# Altium PCB PCB1.PcbDoc
Units mm, origin at the board's own origin, x right, y up, seen from the top; angles counter-clockwise.
Board outline 40.09 x 40.09 mm, 2 copper layers (Top Layer, Bottom Layer); 32 components, 17 nets, 145 pads, 57 vias.
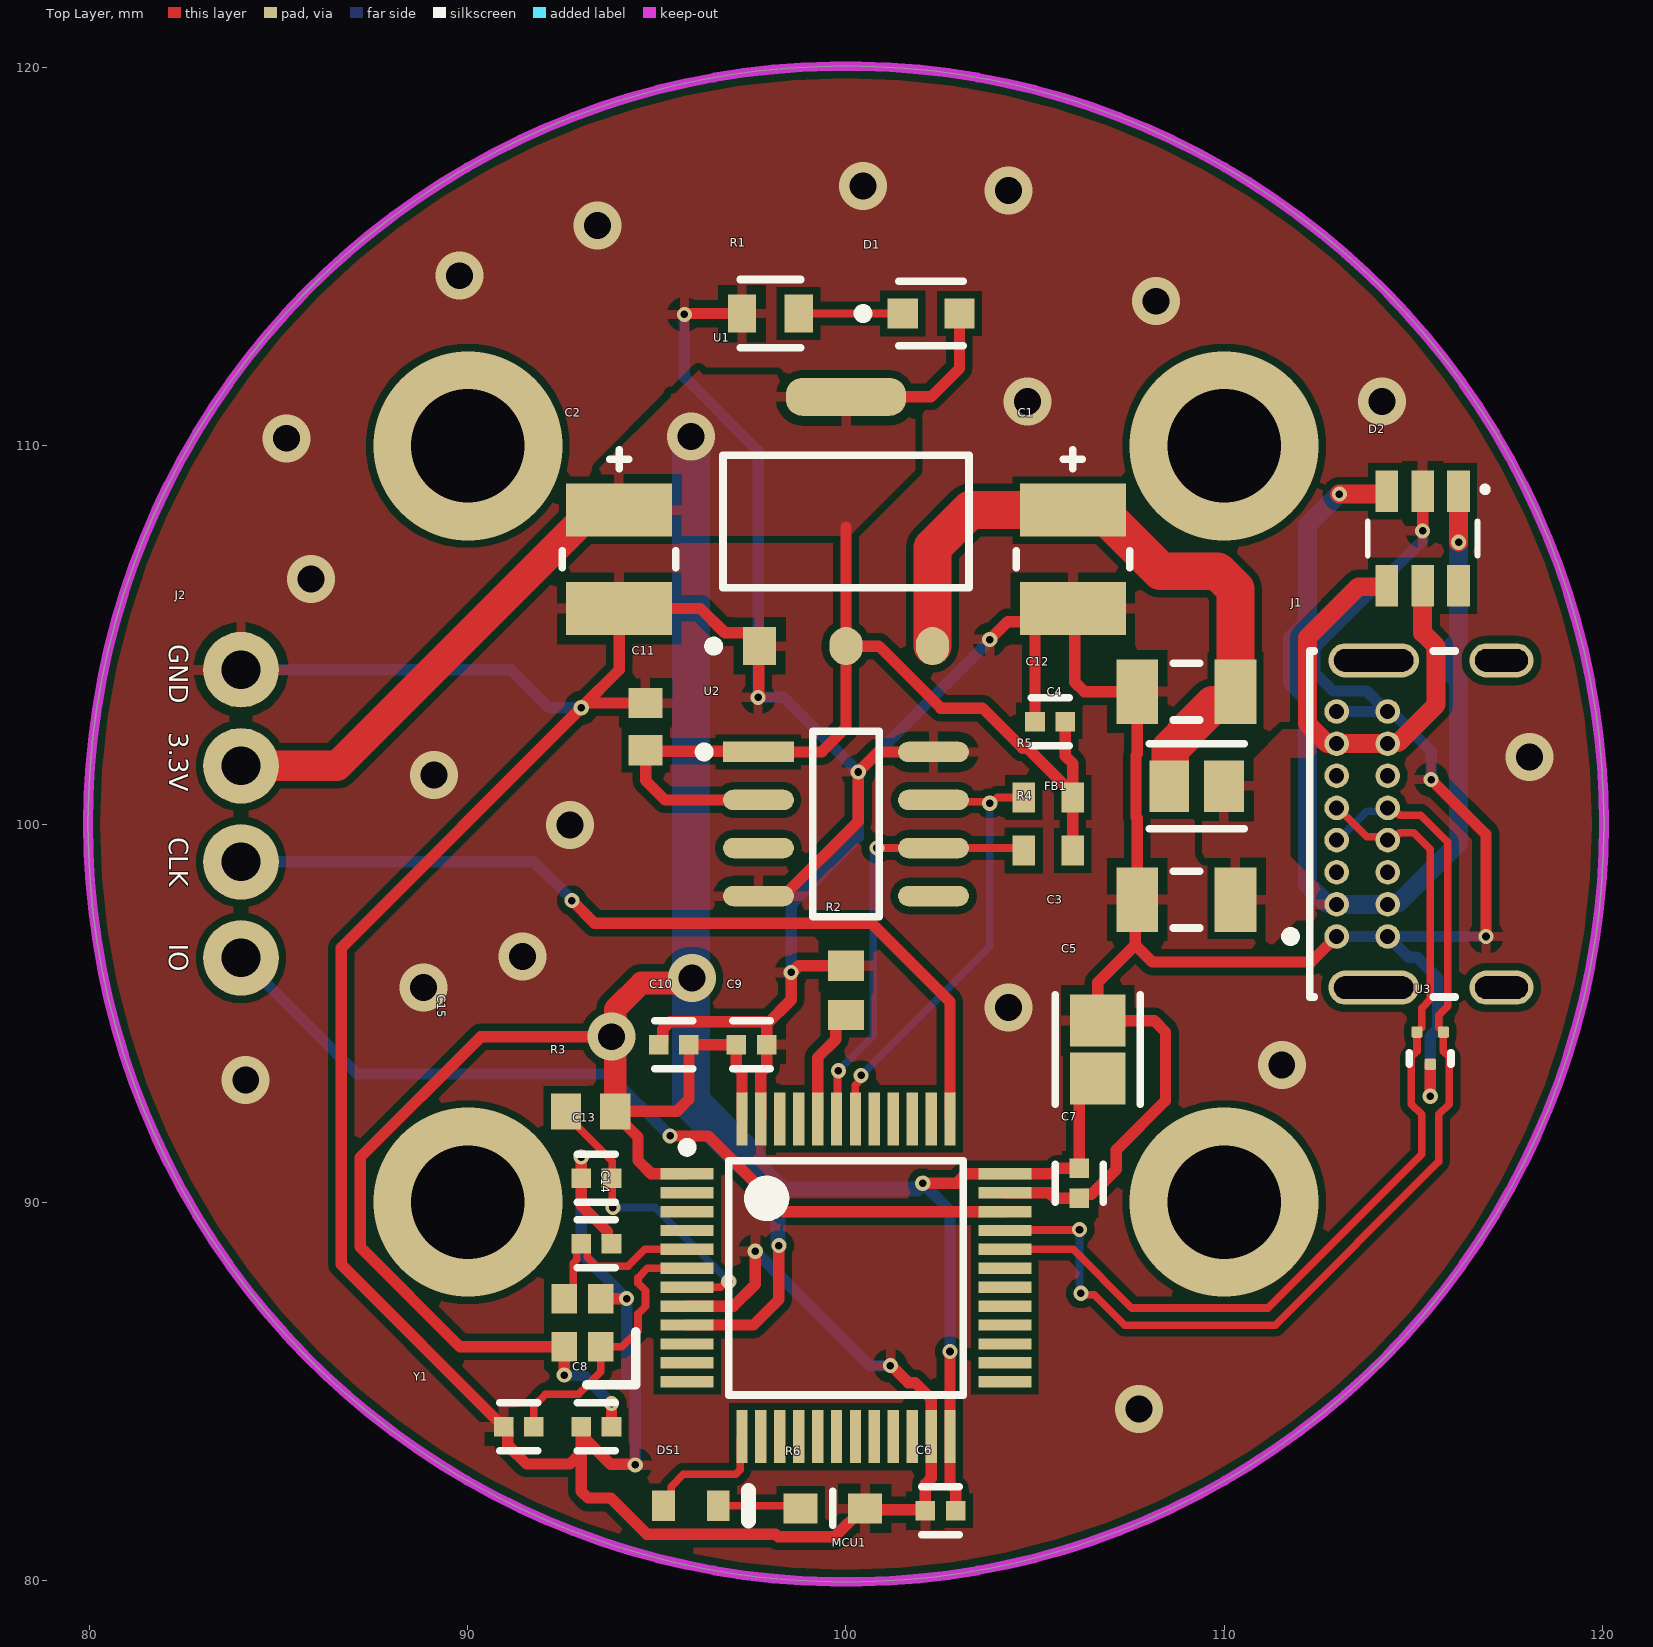
[diagram p0: Top Layer view]
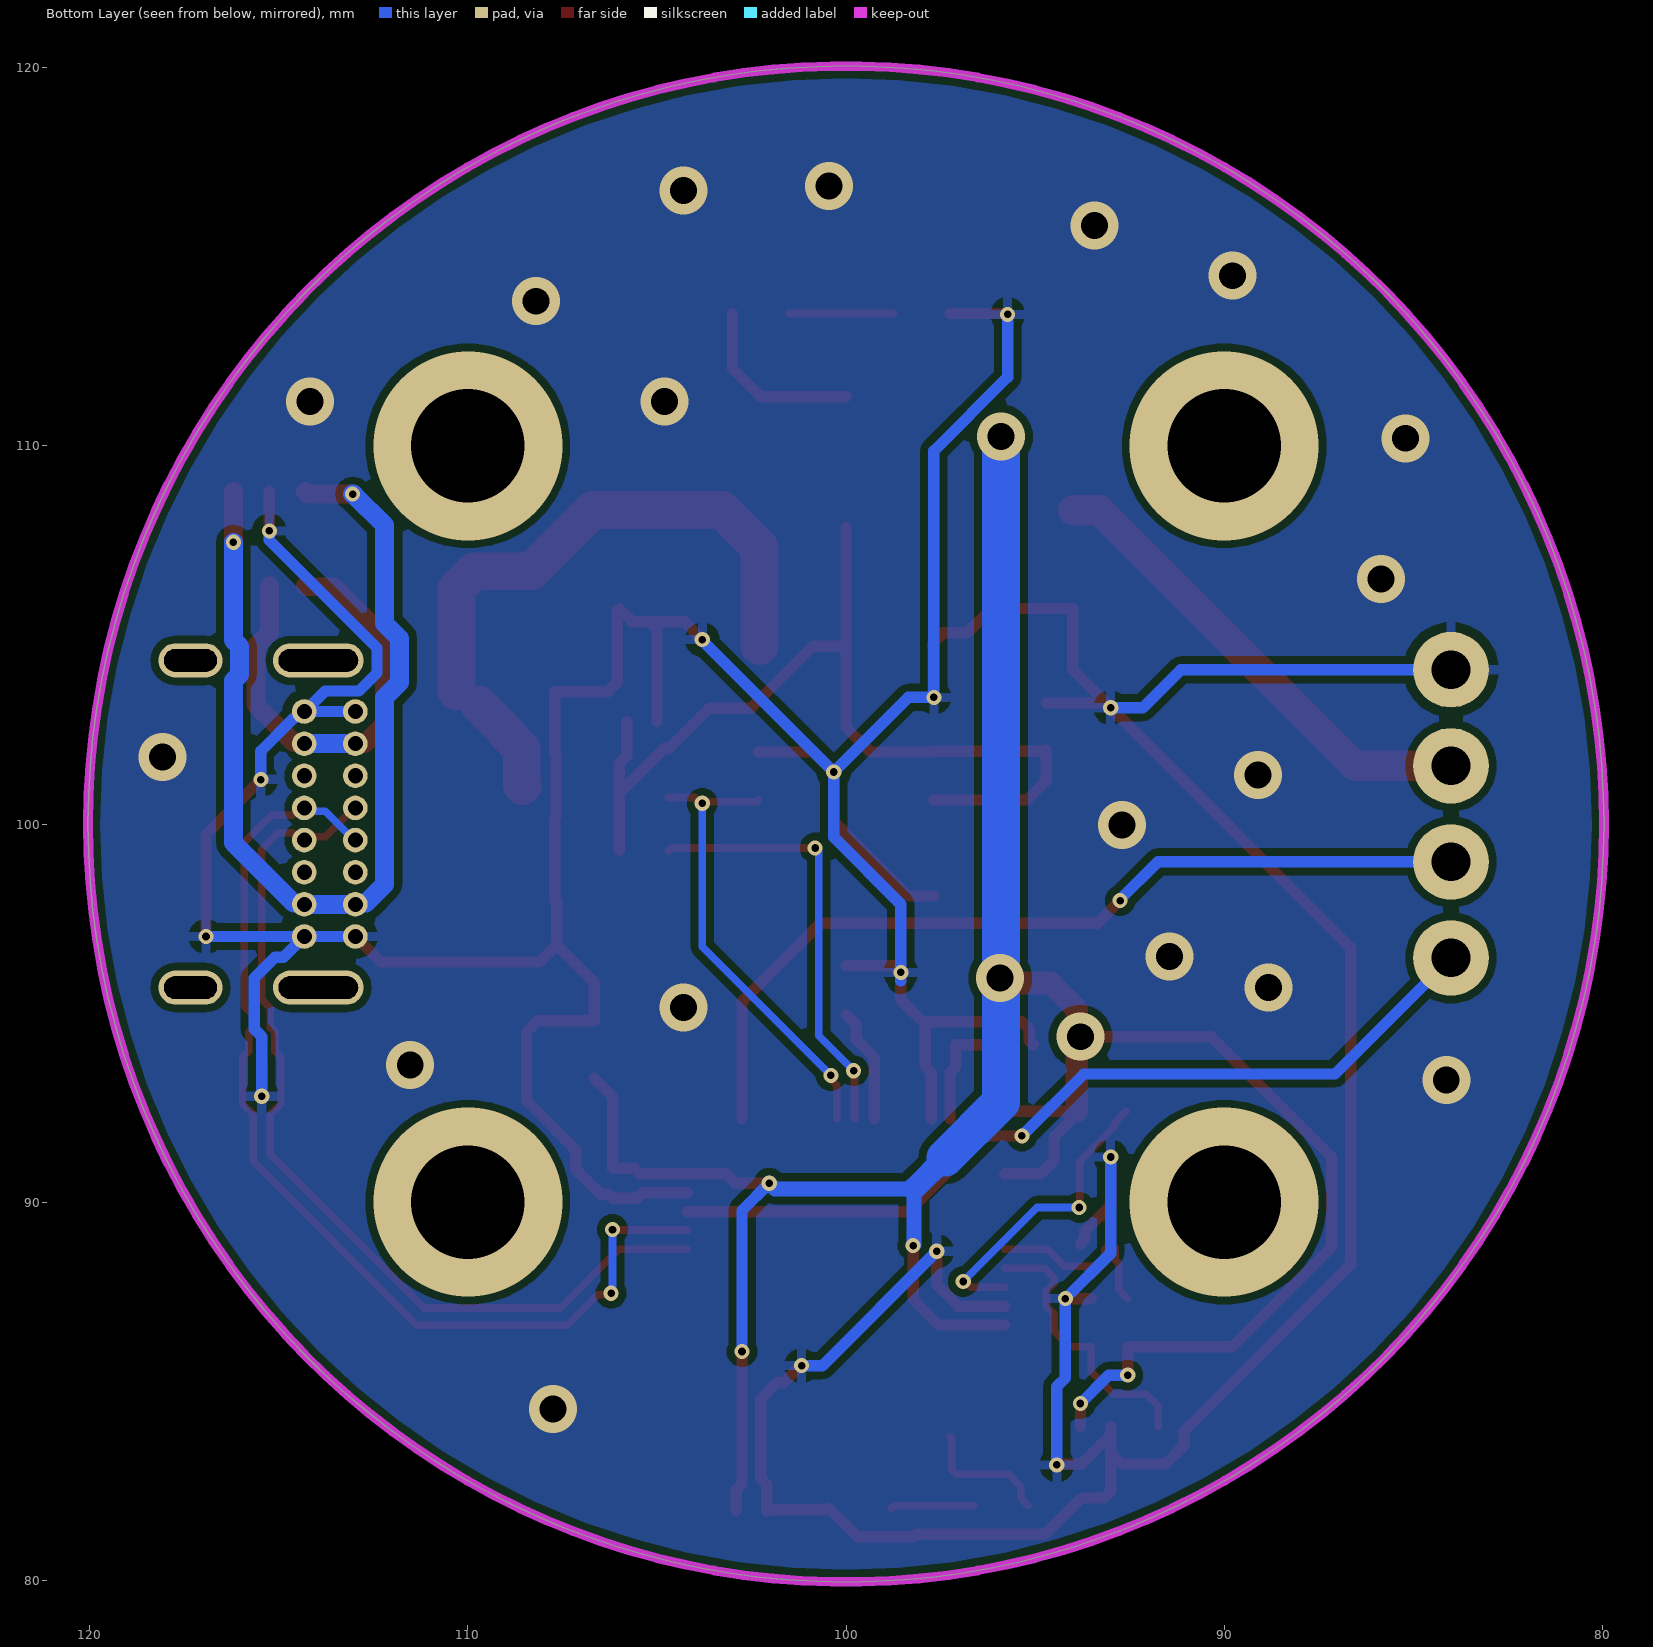
[diagram p1: Bottom Layer view, seen from below]
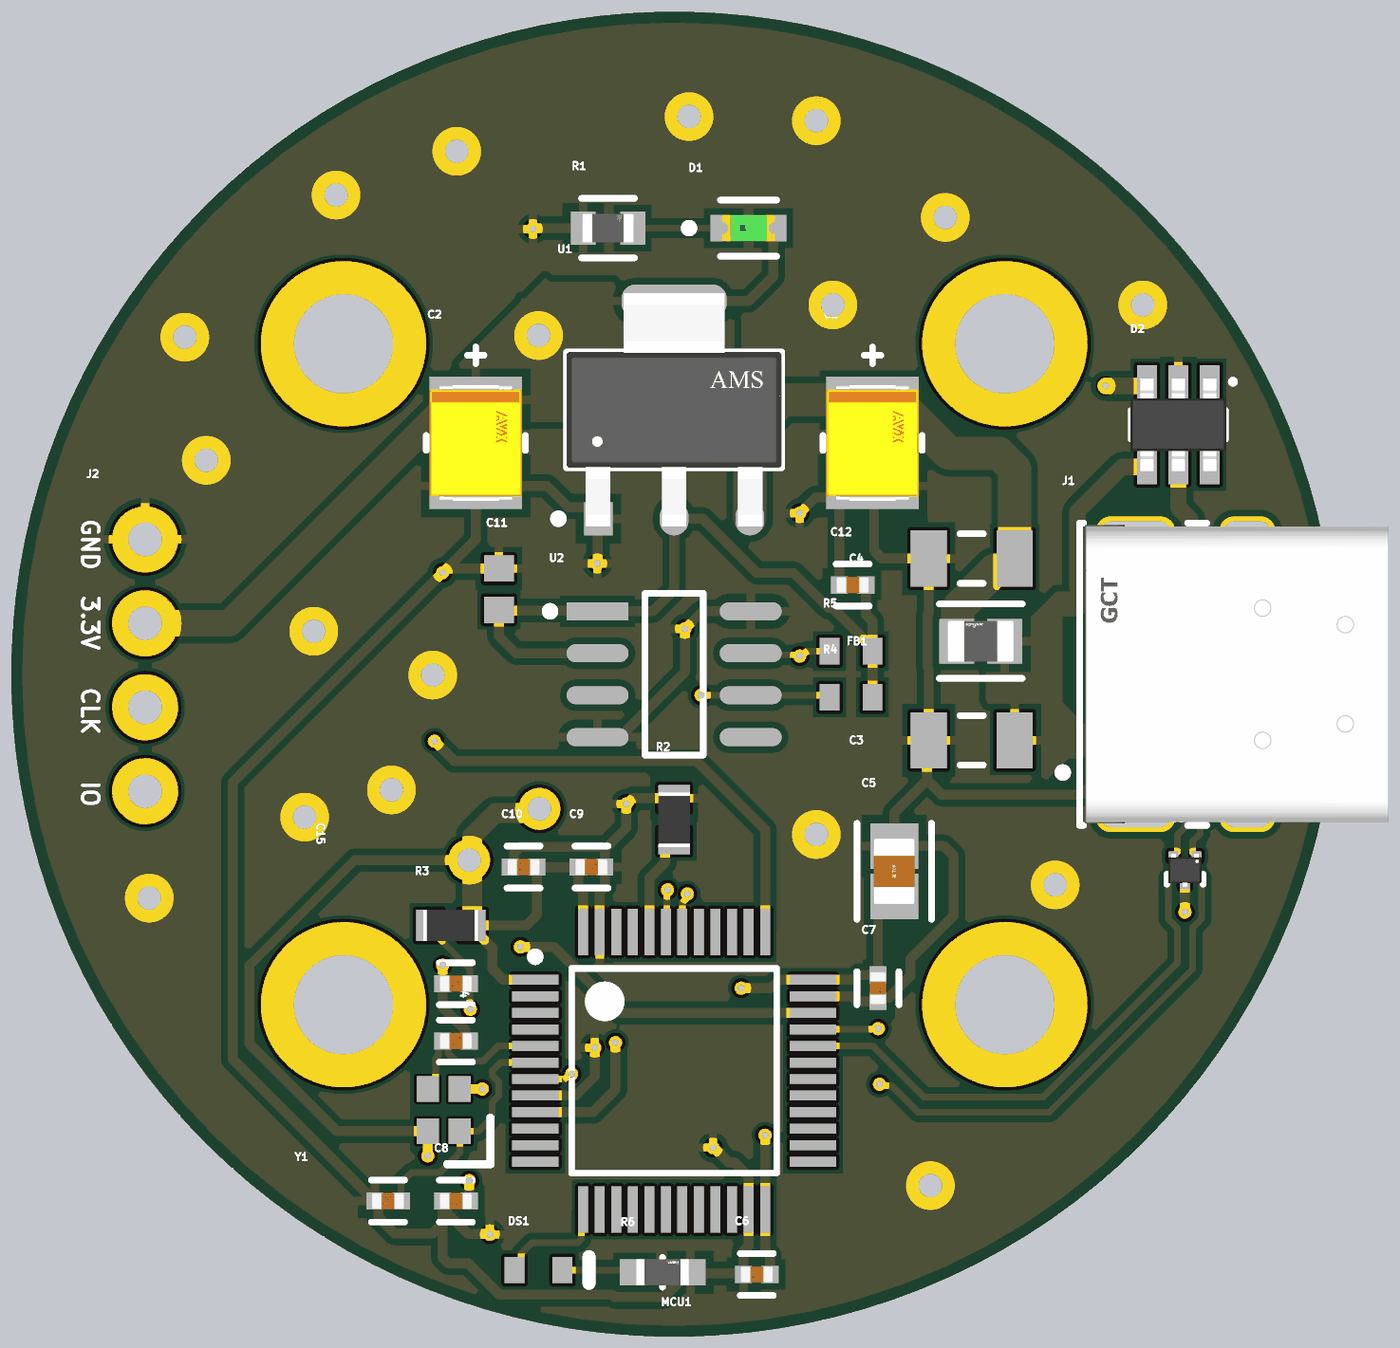
[diagram p2: 3D render of the assembled board from above, using the file's embedded part models]

## Layer stack, top to bottom
Top Solder: solder mask 0.0102, Solder Resist, Dk 3.5
Top Layer: signal copper 0.0356
Dielectric 1: dielectric 0.32, FR-4, Dk 4.8
Bottom Layer: signal copper 0.0356
Bottom Solder: solder mask 0.0102, Solder Resist, Dk 3.5

## Board outline
100,79.953 cw(c100,100) 79.953,100 cw(c100,100) 100,120.047 cw(c100,100) 120.047,100 cw(c100,100)

## Design rules (kind name [scope] priority, off if disabled: settings)
Clearance [All] p1: gap=0.2 ignorepadtopadclearanceinfootprint=TRUE except(0.15: SMDPad-SMDPad)
DiffPairsRouting [All] p1: maxlimit=0.254 minlimit=0.2 mostfreqgap=0.254 toplayer_minwidth=0.2 toplayer_maxwidth=0.381 toplayer_prefwidth=0.381 bottomlayer_minwidth=0.2 bottomlayer_maxwidth=0.381 bottomlayer_prefwidth=0.381 maxuncoupledlength=12.7
HoleSize [All] p1: absolutevalues=TRUE maxlimit=5 minlimit=0.025 maxpercent=80.000 minpercent=20.000
MinimumSolderMaskSliver [All] p1: minsoldermaskwidth=0.2
PolygonConnect [All] p1: connectstyle=Relief reliefconductorwidth=0.254 reliefentries=4 polygonreliefangle="90 Angle" airgapwidth=0.254
RoutingVias [All] p1: holewidth=0.2 width=0.4 viastyle="Through Hole" minholewidth=0.15 minwidth=0.3 maxholewidth=8 maxwidth=10
SilkToSilkClearance [All] p1 off: silktosilkclearance=0.254
SilkToSolderMaskClearance [IsPad] p1: minsilkscreentomaskgap=0.2 clearancetoexposedcopper=TRUE
SolderMaskExpansion [All] p1: expansion=0.102 istentingtop=FALSE
SupplyNets "Schematic Supply Nets_2" [InNet('GND')] p1: voltage=0.000
SupplyNets "Schematic Supply Nets_1" [InNet('+3V3')] p2: voltage=0.000
SupplyNets "Schematic Supply Nets" [InNet('+5V')] p3: voltage=0.000
UnRoutedNet [All] p1 off:
Width [All] p1: maxlimit=2 minlimit=0.16 preferedwidth=0.2 minimp=50.000000 maximp=50.000000 favimp=50.000000
24 further rules are at their usual default settings.

## Classes and differential pairs
differential pair USBD: +USBD_P -USBD_N

## Components (designator, comment, footprint, x,y, rotation, side; value= is the part's Value field where it differs from the comment)
C1 "22u tant" FP-TAJB-MFG 106,107 r90 top
C2 "22u tant" FP-TAJB-MFG 94,107 r90 top
C3 "2u2" CAPC3216X180X50LL20T25 109,98 r0 top
C4 "2u2" CAPC3216X180X50LL20T25 109,103.5 r0 top
C5 "4u7" FP-C2012-125-0_2-IPC_B 106.657,94.036 r90 top
C6 "100n" FP-C0402-BB-MFG 102.5,81.836 r180 top value="0.10 μF"
C7 "100n" FP-C0402-BB-MFG 106.164,90.5 r270 top value="0.10 μF"
C8 "100n" FP-C0402-BB-MFG 93.4,84.057 r180 top locked value="0.10 μF"
C9 "100n" FP-C0402-BB-MFG 97.5,94.164 r0 top value="0.10 μF"
C10 "100n" FP-C0402-BB-MFG 95.446,94.164 r180 top value="0.10 μF"
C11 "1u" CAPC1608X87X35LL15T15 94.7,102.575 r270 top
C12 "100n" FP-C0402-BB-MFG 105.4,102.7 r180 top value="0.10 μF"
C13 "100n" FP-C0402-BB-MFG 93.4,90.636 r180 top locked value="0.10 μF"
C14 "10p" FP-C0402-BB-MFG 91.346,84.057 r180 top value="10 pF"
C15 "10p" FP-C0402-BB-MFG 93.4,88.9 r0 top locked value="10 pF"
D1 "GREEN_LED" FP-LTST-C190GKT-MFG 102.25,113.5 r0 top
D2 "82402305" WE-TVS_SOT23-6L 115.25,107.55 r180 top
DS1 "RED_LED" VISH-TLMX1100_V 95.9,81.971 r0 top
FB1 "120R" FP-BLM21-0_2-t0_85-e0_5-d-IPC_C 109.274,101 r180 top
J1 "USB-C" FP-USB4085-GF-A-MFG 117,100 r90 top locked
J2 "SWD_pinout" SWD_pinout 84,104.08 r270 top
MCU1 "STM32F070CBT6" STM32F070CBT6 100,88 r0 top locked
R1 "1k" FP-CRCW0603-e3-MFG 98,113.5 r0 top
R2 "10k" RESC1609X50X30NL8T20 100,95.6 r270 top
R3 "10k" RESC1609X50X30NL8T20 93.246,92.4 r180 top
R4 "2k" RESC1608X55X25LL10T15 105.35,99.3 r0 top
R5 "2k" RESC1608X55X25LL10T15 105.35,100.7 r0 top
R6 "1k" FP-RC0603-0_55-MFG 99.65,81.9 r0 top
U1 "AMS1117-3.3" FP-AMS1117-IPC_C 100,108 r90 top locked
U2 "AS5600-ASOM" FP-AS5600-ASOM-IPC_C 100,100 r0 top locked
U3 "TPD2EUSB30DRTR" DRT0003A 115.45,94.071 r270 top
Y1 "OT201616MJBA4SL" OT201616MJBA4SL 92.544,86.173 r90 top locked

## Footprints (in the part's own frame and the unit in brackets; to place one, negate y for a bottom-side part, rotate by r counter-clockwise, add the part's x,y. Pads: shape width x height; smd on the part's side, far side on the other; paste and mask are expansions set on the pad)
CAPC1608X87X35LL15T15 [mm] "Chip Capacitor, 2-Leads, Body 1.60x0.80mm, IPC High Density"
  rect 0.8x0.9 smd: 1(-0.625,0) 2(0.625,0)
  body extent -0.87,-0.48 0.87,0.48, height 0.87
CAPC3216X180X50LL20T25 [mm] "Chip Capacitor, 2-Leads, Body 3.20x1.60mm, IPC High Density"
  rect 1.1x1.7 smd: 1(-1.3,0) 2(1.3,0)
  silkscreen extent -0.35,-0.75 0.35,0.75, body extent -1.7,-0.9 1.7,0.9, height 1.8
DRT0003A [mm] "SOTFL, 3-Leads, Body 1x1mm (inc leads), Pitch 0.35mm"
  rrect33% 0.3x0.3 smd: 1(-0.425,0.35) 2(-0.425,-0.35) 3(0.425,0)
  silkscreen extent 0.13,-0.55 0.43,0.55, body extent -0.5,-0.5 0.5,0.5, height 0.5
FP-AMS1117-IPC_C [mm]
  rect 1.004x0.872 smd paste+0 mask+0: 1(-3.295,2.29)
  rrect100% 1.004x0.872 smd paste+0 mask+0: 2(-3.295,0) 3(-3.295,-2.29)
  rrect87% 1.004x3.182 smd paste+0 mask+0: 4(3.295,0)
  silkscreen extent -3.42,-3.25 1.75,3.62, body extent -3.9,-3.35 3.9,3.35, height 0.25
FP-AS5600-ASOM-IPC_C [mm]
  rect 1.874x0.542 smd paste+0 mask+0: 1(-2.316,1.905)
  rrect100% 1.874x0.542 smd paste+0 mask+0: 2(-2.316,0.635) 3(-2.316,-0.635) 4(-2.316,-1.905) 5(2.316,-1.905) 6(2.316,-0.635) 7(2.316,0.635) 8(2.316,1.905)
  silkscreen extent -3.88,-2.45 0.88,2.45
FP-BLM21-0_2-t0_85-e0_5-d-IPC_C [mm]
  rect 1.055x1.356 smd paste+0 mask+0: 1(-0.726,0) 2(0.726,0)
  silkscreen extent -1.25,-1.12 1.25,1.12, body extent -1.35,-0.82 1.35,0.82, height 0.25
FP-C0402-BB-MFG [mm]
  rect 0.52x0.52 smd paste+0 mask+0: 1(-0.4,0) 2(0.4,0)
  silkscreen extent -0.5,-0.64 0.5,0.64, body extent -0.8,-0.4 0.8,0.4, height 0.25
FP-C2012-125-0_2-IPC_B [mm]
  rect 1.378x1.456 smd paste+0 mask+0: 1(-0.764,0) 2(0.764,0)
  silkscreen extent -1.45,-1.13 1.45,1.13, body extent -1.7,-0.98 1.7,0.98, height 0.25
FP-CRCW0603-e3-MFG [mm]
  rect 0.75x1 smd paste+0 mask+0: 1(-0.75,0) 2(0.75,0)
  silkscreen extent -0.8,-0.9 0.8,0.9, body extent -1.22,-0.6 1.22,0.6, height 0.25
FP-LTST-C190GKT-MFG [mm]
  rect 0.8x0.8 smd paste+0 mask+0: 1(-0.75,0) 2(0.75,0)
  silkscreen extent -1.92,-0.85 0.85,0.85, body extent -1.25,-0.55 1.25,0.55, height 0.25
FP-RC0603-0_55-MFG [mm]
  rect 0.9x0.8 smd paste+0 mask+0: 1(-0.85,0) 2(0.85,0)
  silkscreen extent 0,-0.45 0,0.45, body extent -1.4,-0.55 1.4,0.55, height 0.25
FP-TAJB-MFG [mm]
  rect 1.4x2.8 smd paste+0 mask+0: 1(-1.3,0) 2(1.3,0)
  silkscreen extent -0.23,-1.5 2.9,1.5, body extent -2.1,-1.6 2.1,1.6, height 0.25
FP-USB4085-GF-A-MFG [mm]
  rrect100% 0.9x2.4 hole 2.1 slot 0.6 at 0 deg paste-2539.97 mask+0: 1(-4.325,3.045) 2(4.325,3.045)
  rrect100% 0.9x1.7 hole 1.4 slot 0.6 at 0 deg paste-2539.97 mask+0: 3(-4.325,-0.335) 4(4.325,-0.335)
  round 0.65 hole 0.4 paste-2539.97 mask+0: A1(-2.975,4.025) A4(-2.125,4.025) A5(-1.275,4.025) A6(-0.425,4.025) A7(0.425,4.025) A8(1.275,4.025) A9(2.125,4.025) A12(2.975,4.025) B1(2.975,2.675) B4(2.125,2.675) B5(1.275,2.675) B6(0.425,2.675) B7(-0.425,2.675) B8(-1.275,2.675) B9(-2.125,2.675) B12(-2.975,2.675)
  silkscreen extent -4.57,0.89 4.57,5.37, body extent -4.87,-4.83 4.87,4.83, height 0.25
OT201616MJBA4SL [mm]
  rect 0.775x0.675 smd mask+0.075: 1(0,-0.975) 2(1.275,-0.975) 3(1.275,0) 4(0,0)
  silkscreen extent -1,-1.9 0.4,-0.6
RESC1608X55X25LL10T15 [mm] "Chip Resistor, 2-Leads, Body 1.60x0.80mm, IPC High Density"
  rect 0.6x0.8 smd: 1(-0.65,0) 2(0.65,0)
  body extent -0.85,-0.45 0.85,0.45, height 0.55
RESC1609X50X30NL8T20 [mm] "Chip Resistor, 2-Leads, Body 1.65x0.95mm, IPC Medium Density"
  rect 0.8x0.95 smd: 1(-0.65,0) 2(0.65,0)
  body extent -0.82,-0.48 0.82,0.48, height 0.5
STM32F070CBT6 [mm] "TSQFP, 48-Leads, Body 7,00x7,00mm, Pitch 0,50mm, IPC Medium Density"
  rect 1.4x0.3 smd: 1(-4.2,2.75) 2(-4.2,2.25) 3(-4.2,1.75) 4(-4.2,1.25) 5(-4.2,0.75) 6(-4.2,0.25) 7(-4.2,-0.25) 8(-4.2,-0.75) 9(-4.2,-1.25) 10(-4.2,-1.75) 11(-4.2,-2.25) 12(-4.2,-2.75) 25(4.2,-2.75) 26(4.2,-2.25) 27(4.2,-1.75) 28(4.2,-1.25) 29(4.2,-0.75) 30(4.2,-0.25) 31(4.2,0.25) 32(4.2,0.75) 33(4.2,1.25) 34(4.2,1.75) 35(4.2,2.25) 36(4.2,2.75)
  rect 0.3x1.4 smd: 13(-2.75,-4.2) 14(-2.25,-4.2) 15(-1.75,-4.2) 16(-1.25,-4.2) 17(-0.75,-4.2) 18(-0.25,-4.2) 19(0.25,-4.2) 20(0.75,-4.2) 21(1.25,-4.2) 22(1.75,-4.2) 23(2.25,-4.2) 24(2.75,-4.2) 37(2.75,4.2) 38(2.25,4.2) 39(1.75,4.2) 40(1.25,4.2) 41(0.75,4.2) 42(0.25,4.2) 43(-0.25,4.2) 44(-0.75,4.2) 45(-1.25,4.2) 46(-1.75,4.2) 47(-2.25,4.2) 48(-2.75,4.2)
  silkscreen extent -4.32,-3.1 3.1,3.57, body extent -3.5,-3.5 3.5,3.5, height 1.6
SWD_pinout [mm]
  round 2 / inner round 1.524 / far side round 2 hole 1.02: 1(0,0) 2(2.54,0) 3(5.08,0) 4(7.62,0)
VISH-TLMX1100_V [mm] "SMD, 2-Leads, Body 1.6x0.8mm"
  rect 0.6x0.8 smd: 1(-0.725,0) 2(0.725,0)
  silkscreen extent 1.53,-0.4 1.53,0.4, body extent -0.8,-0.4 0.8,0.4, height 0.65
WE-TVS_SOT23-6L [mm] "TVS Diode, package SOT23-6L"
  rect 0.6x1.1 smd: 1(-0.95,-1.25) 2(0,-1.25) 3(0.95,-1.25) 4(0.95,1.25) 5(0,1.25) 6(-0.95,1.25)
  silkscreen extent -1.73,-1.37 1.45,0.45, body extent -1.45,-1.4 1.45,1.4, height 1.16

## Part data
C1 C2: library part CMP-2100-03689-2, "22uF 16V  ±10% 2.3Ω 1210  SMD Tantalum Capacitor", Capacitance=22uF, Case Code (Imperial)=1210, Case Code (Metric)=3528, Dielectric Material=Tantalum, ESR (Equivalent Series Resistance)=2.3R, Leakage Current=3.5uA, Max Operating Temperature=125°C, Min Operating Temperature=-55°C, Package Quantity=1, Tolerance=10%, Voltage=16V, Case/Package=1210, Construction=Flat, Depth=2.8mm, Dissipation Factor=6%, Features="General Purpose", Height=1.9mm, Height - Seated (Max)=0.083inch, Lead Free="Lead Free", Length=3.5mm, Mount="Surface Mount", Number of Pins=2, Packaging="Tape and Reel", Polarity=Polar, Radiation Hardening=No, REACH SVHC="No SVHC", RoHS Compliant=Yes, Series=TAJ, Termination=SMD/SMT, Voltage Rating=16V, Voltage Rating (DC)=16V, Width=2.8mm
C3 C4: library part CMP-1037-04831-2, "Chip Capacitor, 2.2 uF, +/- 10%, 50 V, -55 to 125 degC, 1206 (3216 Metric), RoHS, Tape and Reel", Capacitance=2.2uF, Capacitance - nF=2200nF, Case Code - in=1206, Case Code - mm=3216, Case Height=1.6mm, Case Length=3.2mm, Dielectric=X7R, Manufacturer=Kemet, Maximum Operating Temperature=+125C, Minimum Operating Temperature=-55C, Operating Temperature Range=-55Cto+125C, Package / Case=1206(3216metric), Package Description="2-Pin Surface Mount Device, Body 3.2 x 1.6 mm", Temperature Coefficient / Code=+/-15%, Tolerance=10%, Voltage Rating=50V, Brand=Kemet, Case Width=1.6mm, Class=Class1, Datasheet URL=http://www.kemet.com/docfinder?Partnumber=C1206C225K5RACTU, Datasheet Version=02/2016, Dimensions=1.6mmWx3.2mmLx1.6mmH, Factory Pack Quantity=2000, Manufacturer URL=http://www.kemet.com/, Mounting Technology=SurfaceMount, Package Reference=1206, Packaging=Reel, Product=GeneralTypeMLCCs, Product Category=MultilayerCeramicCapacitorsMLCC-SMD/SMT, RoHS=Details, Series=C1206C, Termination Style=SMD/SMT, Type=SMDMLCCX7R6.3-250VDCCommericalGrade, Voltage Rating DC=50V
C5: library part CMP-08246-000007-2, "Multilayer Ceramic Capacitors 4.7μF ±10% 50V X5R SMD 0805", Capacitance=4.7uF, Case Code (Imperial)=0805, Case Code (Metric)=2012, Dielectric=X5R, Dielectric Material=Ceramic, Max Operating Temperature=85°C, Min Operating Temperature=-55°C, Package Quantity=1, Tolerance=10%, Voltage=50V, Case/Package=0805, Construction=Flat, Depth=1.25mm, Height=1.25mm, Lead Free="Lead Free", Length=2mm, Mount="Surface Mount", Packaging="Tape and Reel", Radiation Hardening=No, REACH SVHC="No SVHC", Resistor Type=Ceramic, Series=C, Termination=SMD/SMT, Thickness=0.057inch, Voltage Rating=50V, Voltage Rating (DC)=50V, Weight=0.000194oz, Width=0.049inch
C6 C7 C8 C9 C10 C12 C13: library part CMP-2008-02046-2, "CAP CER 0.1UF 10V X5R 0402", Capacitance="0.10 μF", Manufacturer=Kemet, Manufacturer Part Number=C0402C104K8PACTU, Package=C0402-BB, Temperature="-55°C to +125°C", Temperature Characteristic=X5R, Temperature Coefficient=15%, Temperature Range High=+125°C, Temperature Range Low=-55°C, Tolerance=0.1, Voltage Rating="10 V", Automotive=No, Category=Cap, ComponentLink2Description=Datasheet, ComponentLink2URL=https://content.kemet.com/datasheets/KEM_C1002_X7R_SMD.pdf, Device Class L1="Passive Components", Device Class L2=Capacitors, Device Class L3="Ceramic Capacitors", Digikey Description="CAP CER 0.1UF 10V X5R 0402", Height=0.55mm, Ipc Land Pattern Name=CAPC10050X50, Lead Free=Yes, Material=Ceramic, Mouser Description="Capacitor 100 nF 10 VDC 0402", Octopart=https://octopart.com/c0402c104k8pactu-kemet-140039, RoHS=TRUE
C11: library part CMP-2006-03713-1, Manufacturer=Kemet, Part Number=C0603C105K3RACTU
C14 C15: library part CMP-2008-03404-2, "Multilayer Ceramic Capacitor, C Series, 10 Pf, - 5%, C0G / Np0, 50 V, 0402 [1005 Metric] Rohs Compliant: Yes", Capacitance="10 pF", Manufacturer=Kemet, Manufacturer Part Number=C0402C100J5GACTU, Package=C0402-BB, Temperature="-55°C to +125°C", Temperature Characteristic=C0G, Temperature Coefficient=15%, Temperature Range High=+125°C, Temperature Range Low=-55°C, Tolerance=0.05, Voltage Rating="50 V", Automotive=No, Category=Cap, ComponentLink2Description=Datasheet, ComponentLink2URL=https://content.kemet.com/datasheets/KEM_C1002_X7R_SMD.pdf, Device Class L1="Passive Components", Device Class L2=Capacitors, Device Class L3="Ceramic Capacitors", Digikey Description="Multilayer Ceramic Capacitor, C Series, 10 Pf, - 5%, C0G / Np0, 50 V, 0402 [1005 Metric] Rohs Compliant: Yes", Height=0.55mm, Ipc Land Pattern Name=CAPC10050X50, Lead Free=Yes, Material=Ceramic, Mouser Description="Multilayer Ceramic Capacitor, C Series, 10 Pf, - 5%, C0G / Np0, 50 V, 0402 [1005 Metric] Rohs Compliant: Yes", Octopart=https://octopart.com/c0402c100j5gactu-kemet-108448, RoHS=TRUE
D1: library part CMP-22017-000005-2, "LED GREEN CLEAR CHIP SMD", Case Code (Imperial)=0603, Case Code (Metric)=1608, Color=Green, Forward Current=30mA, Forward Voltage=2.1V, Lens Color=Colorless, Max Operating Temperature=85°C, Min Operating Temperature=-55°C, Package Quantity=1, Power Dissipation=100mW, Reverse Voltage=5V, Test Current=10mA, Voltage=2V, Case/Package=0603, Depth=0.8mm, Dominant Wavelength=569nm, Height=0.8mm, Illumination Color=Green, Lead Free="Lead Free", Length=1.6mm, Lens Style=Clear, Lens Transparency=Clear, Luminous Intensity=6mcd, Mount="Surface Mount", Number of Elements=1, Number of LEDs=1, Number of Pins=2, Packaging="Tape and Reel", Power Rating=100mW, Radiation Hardening=No, Viewing Angle=130°, Wavelength=565nm, Width=0.8mm
D2: library part CMP-1485-00003-2, Breakdown Voltage=6V, Capacitance=13pF, Case/Package=SOT-23, Clamping Voltage=6.8V, Forward Voltage=800mV, Max Operating Temperature=85°C, Max Reverse Leakage Current=2.5A, Max Surge Current=6A, Min Operating Temperature=-55°C, Power Line Protection=No, Reverse Standoff Voltage=5V, Test Current=1mA, Composition=Zener, Direction=Unidirectional, Element Configuration="Common Anode", ESD Protection=Yes, Height=1.16mm, Length=2.9mm, Max Breakdown Voltage=6V, Min Breakdown Voltage=6V, Mount="Surface Mount", NexarPartId=18190104, Number of Channels=5, Number of Pins=6, Number of Unidirectional Channels=5, Packaging="Cut Tape (CT)", Peak Pulse Current=6A, Polarity=Unidirectional, REACH SVHC=Unknown, RoHS=Compliant, Termination=SMD/SMT, Width=2.8mm, Working Voltage=5V
DS1: library part CMP-1666-00027-1, "LED, RED, 2.1 V, -40 to 100 degC, 2-Pin SMD (0603), RoHS, Tape and Reel", Capacitance="12 pF", Case Code (Imperial)=0603, Case Code (Metric)=1608, Max Operating Temperature=125degC, Min Operating Temperature=-55degC, Package Quantity=4000, Resistance="100000000000 Ohm", Tolerance=5%, Type (Capacitors)=C0G, Voltage Rating="50 V", Case/Package=0603, ComponentLink1Description="Manufacturer URL", ComponentLink1URL=http://www.vishay.com/, ComponentLink2Description=Datasheet, ComponentLink2URL=http://www.vishay.com/docs/83173/tlmb1100.pdf, DatasheetVersion="Rev. 2.7, 03/2016", Height="0.8 mm", Length="1.6 mm", Mount="Surface Mount", PackageDescription="2-Pin Surface Mount Device, Body 1.6 x 0.8 mm", PackageReference=TLMX1100, Packaging="Tape and Reel", Pins=2, Radiation Hardening=No, REACH SVHC="No SVHC", RoHSCompliant=True, Voltage Rating (DC)="50 V", Width="0.8 mm"
FB1: library part CMP-0686-00612-3, "Chip Ferrite Bead, 0805, 120Ω @ 100MHz, 0.03Ω, 25%, 3A", Case Code (Imperial)=0805, Case Code (Metric)=2012, Current Rating=3A, DC Resistance (DCR)=30mR, Max Operating Temperature=125°C, Min Operating Temperature=-55°C, Package Quantity=1, Test Frequency=100MHz, Tolerance=25%, Case/Package=0805, DC Resistance-Max=30mR, Depth=1.25mm, Height=0.85mm, Impedance=120R, Lead Free="Lead Free", Length=2mm, Material=Steel, Max Current Rating=3A, Max DC Current=3A, Number of Circuits=1, Number of Lines=1, Number of Pins=2, Packaging="Tape and Reel", REACH SVHC="No SVHC", RoHS Compliant=Yes, Series=BLM21P, Termination=SMD/SMT, Width=1.25mm
J1: library part CMP-196119-000001-2, "CONN RCPT USB2.0 TYPE C 24POS RA", Contact Material="Copper Alloy", Contact Plating=Gold, Gender=Receptacle, Number of Positions=16, Orientation="Right Angle", USB Standard="USB 2.0"
R1: library part CMP-2000-03062-2, "RES Thick Film, 200Ω, 1%, 0.1W, 100ppm/°C, 0603", Case Code (Imperial)=0603, Case Code (Metric)=1608, Max Operating Temperature=155°C, Min Operating Temperature=-55°C, Package Quantity=5000, Power Rating=100mW, Resistance=200R, Temperature Coefficient=100ppm/°C, Tolerance=1%, Voltage Rating=75V, Case/Package=0603, Composition="Thick Film", Contact Plating=Tin, Depth=0.85mm, Height=0.45mm, Lead Free="Lead Free", Length=1.55mm, Military Standard=Not, Number of Pins=2, Packaging="Tape and Reel", Termination=SMD/SMT, Voltage Rating (DC)=75V, Weight=7.1E-05oz, Width=0.85mm
R2 R3: library part CMP-1666-00005-4, "Chip Resistor, 10 KOhm, +/- 1%, 100 mW, -55 to 155 degC, 0603 (1608 Metric), RoHS, Tape and Reel", Manufacturer="Vishay Semiconductor", Max Operating Temperature="155 degC", Min Operating Temperature="-55 degC", Package Quantity=5000, Voltage Rating="75 V", ComponentLink1Description="Manufacturer URL", ComponentLink1URL=http://www.vishay.com/, ComponentLink2Description=Datasheet, ComponentLink2URL=https://datasheet.ciiva.com/11809/0900766b80d98afc-11809037.pdf, DatasheetVersion=06/2012, Height="0.45 mm", Length="1.55 mm", Mounting Technology="Surface Mount", PackageDescription="2-Pin Surface Mount Device, Body 1.575 x 0.85 mm", PackageReference=0603, Packaging="Tape and Reel", REACH SVHC=Unknown, RoHSCompliant=true
R4 R5: library part CMP-2000-06942-1, "Chip Resistor, 4.7 KOhm, +/- 1%, 0.1 W, -55 to 155 degC, 0603 (1608 Metric), RoHS, Tape and Reel", Case Code - in=0603, Case Code - mm=1608, Manufacturer=Yageo, Operating Temperature Range=-55Cto+155C, Package Description="2-Pin Surface Mount Device, Body 1.6 x 0.8 mm", Power Rating=100mW, Resistance=4.7kOhms, Temperature Coefficient=100PPM/C, Tolerance=1%, Voltage Rating=50V, Datasheet URL=http://www.yageo.com/documents/recent/PYu-RC_Group_51_RoHS_L_7.pdf, Datasheet Version="Rev. 7, 05/2017", Manufacturer URL=http://www.yageo.com/, Mounting Technology=SurfaceMount, Package Reference=0603, Packaging=Reel, Product=ThickFilmResistorsGeneralPurpose, Series=RC, Termination Style=SMD/SMT
R6: library part CMP-2100-03663-2, Case Code (Imperial)=0603, Max Operating Temperature=155°C, Min Operating Temperature=-55°C, Power Rating=100mW, Resistance=100Ω, Temperature Coefficient=100ppm/°C, Tolerance=1%, Voltage Rating=50V, Case Code (Metric)=0603, Case/Package=0603, Composition="Thick Film", Depth=800µm, Height=450µm, Lead Free="Lead Free", Length=1.6mm, Military Standard=Not, NexarPartId=55402879, Number of Pins=2, Packaging="Tape & Reel", REACH SVHC=Unknown, RoHS=Compliant, Schedule B="8533210045, 8533210045", Termination=SMD/SMT, Voltage Rating (DC)=50V, Width=800µm
U1: library part CMP-209535-000001-1, "LDO Voltage Regulators 1A, 3.3V", Dropout Voltage=1.1V, Manufacturer="Advanced Monolithic Systems", Max Junction Temp=+125°C, Max Power Dissipation=1.2W, Max Supply Voltage=15V, Nominal Supply Current=5mA, Output Current=1A, Output Voltage=3.3V, Package=AMS1117, Temperature="-40°C to +125°C", Temperature Range Low=-40°C, Automotive=No, Category=IC, ComponentLink2Description=Datasheet, ComponentLink2URL=http://www.advanced-monolithic.com/pdf/ds1117.pdf, Device Class L1="Integrated Circuits (ICs)", Device Class L2="Power Management ICs", Device Class L3="Voltage Regulators - Linear", Height=1.8mm, Ipc Land Pattern Name=SOT229P700X180-4, Lead Free=Yes, Manufacturer Part Number=AMS1117-3.3, Number Of Outputs=1, Octopart=https://octopart.com/ams1117-3.3-advanced+monolithic+systems-25899300, Output Type=Fixed, RoHS=TRUE, Standoff Height=0.64mm, Temperature Range High=+125°C
U2: library part CMP-22826-000002-1, "SENSOR ANGLE 360DEG SMD", Max Operating Temperature=125°C, Min Operating Temperature=-40°C, Lead Free="Lead Free", Mount="Surface Mount", Sensing Method="Hall Effect", Termination=SMD/SMT
U3: library part CMP-0326-00046-3, "ESD Solution for Super-Speed (6 Gbps) USB 3.0 Interface, 2 Channels, -40 to +85 degC, 3-pin SOT (DRT), Green (Rohs & No Sb/Br)", Breakdown Voltage(Min)(V)=9, Differential Capacitance(pF)=0.01, IO Capacitance(Typ)(pF)=0.7, IO Leakage Current(nA)=10, Manufacturer="Texas Instruments", 1394 / Firewire=TRUE, ComponentLink1Description=Datasheet, ComponentLink1URL=http://www.ti.com/general/docs/lit/getliterature.tsp?genericPartNumber=TPD2EUSB30&fileType=pdf, ComponentLink2Description="URL Link1", ComponentLink2URL=SamplesURL:http://www.ti.com/product/tpd2eusb30#samples, DatasheetVersion=SLVSAC2C, Eco-Plan="Green (RoHS & no Sb/Br)", HDMI=TRUE, IEC 61000-4-2 Air-Gap(+/- kV)=8, IEC 61000-4-2 Contact(+/- kV)=8, Mounting Technology="Surface Mount", PackageDescription="3-Flat Lead Plastic Small Outline, 1 x 1 mm (inc leads), 0.35 mm Pitch", PackageReference=DRT0003A, PackageVersion="revD, Jun-2008", PartNumber=TPD2EUSB30DRTR, Serial ATA / eSATA=TRUE, SubFamily="ESD Solution", USB Full Speed=TRUE, USB High Speed=TRUE, USB Super Speed=TRUE

## Via types
v1: diameter 0.4, hole 0.2, Top Layer to Bottom Layer, 32 vias
v2: diameter 1.27, hole 0.711, Top Layer to Bottom Layer, 21 vias
v3: diameter 5, hole 3, Top Layer to Bottom Layer, 4 vias

## Nets (pads, with @x,y where several pads share a name; then routed paths per layer and width w, separated by ;. In a path a pad name is that pad's centre, name@x,y a point inside that pad or via, vN(x,y) a via of type N, cw(c..) or ccw(c..) an arc to the next point about the centre after c; other vN are vias at no path point)
+3V3: C2.2 C5.1 C6.1 C7.1 C8.1 C9.1 C10.1 C11.2 C12.1 D1.2 J2.2 MCU1.1 MCU1.9 MCU1.24 MCU1.36 MCU1.48 R3.1 R4.2 R5.2 U1.2 U1.4 U2.1 U2.2 Y1.4 | length 124.5
  Top Layer w0.3: v1(92.55,85.425) 92.547,85.428 92.547,86.17 Y1.4 89.796,86.173 87.15,88.819 87.15,91.181 90.344,94.375 v2(93.8,94.375) ; C8.1 v1(93.8,84.675) ; MCU1.9 97.55,86.75 98.225,87.425 98.225,88.85 v1(98.226,88.851) ; MCU1.1 94.85,90.75 94.5,91.1 94.5,91.721 93.896,92.325 R3.1 95.525,92.4 95.85,92.725 95.85,94.16 C10.1 C9.1 97.1,93.575 97.25,93.425 MCU1.48 ; U2.2 95.215,100.635 94.7,101.15 C11.2 94.723,101.927 97.661,101.927 U2.1 99.355,101.905 100,102.55 100,104.605 100.05,104.655 U1.2 ; 100,107.85 U1.2 ; U1.4 102.245,111.295 103,112.05 D1.2 ; v1(102.029,90.5) 102.925,90.5 103.175,90.75 MCU1.36 105.45,90.75 105.6,90.9 C7.1 106.164,92.779 C5.1 ; v1(102.75,86.05) MCU1.24 102.75,82.55 102.9,82.4 C6.1 ; C12.1 105.8,101.8 106,101.6 R5.2@106,100.8 ; R4.2 R5.2 R5.2@106,100.8 ; U1.2 100.87,104.705 102.51,103.065 103.61,103.065 104.667,102.007 104.793,102.007 R5.2@106,100.8
  Top Layer w0.6: R3.1 93.896,95.104 94.588,95.797 95.797,95.797 v2(95.925,95.925)
  Top Layer w0.8: J2.2 86.54,101.54 93.3,108.3 C2.2
  Bottom Layer w0.3: v1(92.55,85.425) 93.05,85.425 v1(93.8,84.675) ; v1(102.029,90.5) 102.75,89.779 v1(102.75,86.05)
  Bottom Layer w0.4: v1(98.226,88.851) 98.2,88.878 98.2,90.35 101.879,90.35 v1(102.029,90.5)
  Bottom Layer w0.6: 97.375,91.175 98.2,90.35
  Bottom Layer w1: v2(95.9,110.25) 95.9,92.65 97.375,91.175
+5V: C1.2 C4.2 FB1.2 U1.3 | length 17.2
  Top Layer w1: U1.3 102.29,107.315 103.275,108.3 C1.2 106.7,108.3 108.314,106.686 109.828,106.686 110.3,106.214 C4.2 ; FB1.2 108.576,101.027 108.576,101.986 108.95,102.36 108.95,102.4 109.7,103.15
BOOT0: MCU1.44 R2.2 | length 3.1
  Top Layer w0.3: MCU1.44 99.25,93.824 99.732,94.306 99.732,94.7 99.982,94.95 R2.2
GND: C1.1 C2.1 C3.1 C4.1 C5.2 C6.2 C7.2 C8.2 C9.2 C10.2 C11.1 C12.2 C13.2 C14.2 C15.2 D2.2 J1.A1 J1.A12 J1.B1 J1.B12 J2.1 MCU1.8 MCU1.23 MCU1.35 MCU1.47 R1.1 R2.1 R6.2 U1.1 U2.4 U2.8 U3.3 Y1.2 | length 186.3
  Top Layer w0.3: C8.2 93,83.375 ; v1(93,91.193) 93,89.915 93.69,89.225 93.69,89.01 C15.2 ; 93.11,83.732 93.775,83.067 94.408,83.067 v1(94.425,83.05) ; v1@93.152,103.2 C11.1 ; Y1.2 v1(94.198,87.448) ; C10.2 95.156,94.274 95.156,94.58 95.35,94.774 97.826,94.774 97.9,94.7 ; v1(95.725,113.475) 95.75,113.5 R1.1 ; MCU1.8 97.025,87.25 97.6,87.825 v1(97.6,88.7) ; v1(97.675,103.35) 97.693,103.367 97.693,104.688 U1.1 97.71,104.771 97.424,105.057 96.793,105.057 96.15,105.7 C2.1 94,104.075 v1(93,103.075) 86.65,96.725 86.65,88.353 C14.2 91.056,83.947 91.056,83.569 91.55,83.075 92.7,83.075 93,83.375 ; U2.4 98.35,98.095 100.325,100.07 v1(100.325,101.375) 100.855,101.905 U2.8 ; MCU1.47 97.75,93.425 97.9,93.575 C9.2 97.9,94.7 ; R2.1 98.752,96.25 98.577,96.075 v1(98.55,96.075) 98.55,95.35 97.9,94.7 ; v1(101.175,85.675) 101.2,85.675 101.647,85.228 101.822,85.228 102.25,84.8 MCU1.23 102.25,82.696 102.1,82.546 C6.2 102.068,81.868 100.532,81.868 R6.2 100.45,81.9 99.7,81.15 98.205,81.15 98.134,81.221 94.73,81.221 93.777,82.174 93.176,82.174 93,82.35 93,83.375 ; v1(103.8,104.875) 104.275,105.35 C1.1@105.2,105.35 ; MCU1.35 105.375,90.25 105.525,90.1 C7.2 106.274,90.21 106.489,90.21 107.15,90.871 107.15,91.385 108.45,92.685 108.45,94.5 108.15,94.8 C5.2 106.657,95.808 107.649,96.8 ; C12.2 105,105.15 C1.1@105.2,105.35 ; J1.A1 112.3,96.35 108.099,96.35 107.649,96.8 ; v1(115.25,107.75) D2.2 ; v1(115.45,92.8) U3.3 ; v1(115.475,101.175) 116.925,99.725 v1(116.925,97.025) ; C1.1@105.2,105.35 105.65,105.35 C1.1 106.05,105.65 106.05,103.75 106.3,103.5 C4.1 107.7,101.852 107.671,101.823 107.671,100.177 107.7,100.148 C3.1 107.649,97.949 107.649,96.8
  Bottom Layer w0.3: J2.1 91.145,104.08 92.15,103.075 v1(93,103.075) ; v1(93,91.193) 93,88.646 v1(94.198,87.448) 94.198,85.349 94.425,85.122 v1(94.425,83.05) ; v1(95.725,113.475) 95.725,111.818 97.675,109.868 v1(97.675,103.35) 98.35,103.35 v1(100.325,101.375) ; v1(97.6,88.7) 100.625,85.675 v1(101.175,85.675) ; 98.55,95.85 v1(98.55,96.075) 98.55,97.878 100.325,99.653 v1(100.325,101.375) ; v1(103.8,104.875) 103.8,104.85 v1(100.325,101.375) ; J1.A1 J1.B12 ; J1.A12 J1.B1@114.315,102.975 ; v1(115.25,107.75) 115.25,107.501 112.405,104.656 112.405,103.994 112.881,103.518 113.772,103.518 J1.B1@114.315,102.975 ; v1(115.45,92.8) 115.45,94.376 115.65,94.576 115.65,95.925 115.1,96.475 114.875,96.475 J1.B12 ; v1(115.475,101.175) 115.475,101.93 114.605,102.8 114.595,102.8 114.42,102.975 J1.B1 J1.B1@114.315,102.975 ; v1(116.925,97.025) J1.B12
  other v2: 107.75,84.525 84.125,93.225 111.525,93.625 104.3,95.15 88.825,95.675 91.45,96.5 92.7,99.975 89.1,101.3 118.075,101.775 85.85,106.475 85.2,110.2 104.8,111.175 114.175,111.175 108.2,113.825 89.775,114.5 93.425,115.825 104.3,116.75 100.45,116.875
"LED K": D1.1 R1.2 | length 2.7
  Top Layer w0.2: R1.2 D1.1
MCU_SWD_CLK: J2.3 MCU1.37 | length 23.4
  Top Layer w0.3: v1(92.75,97.975) 93.35,97.375 100.675,97.375 102.75,95.3 MCU1.37
  Bottom Layer w0.3: J2.3 91.75,99 92.75,98 v1(92.75,97.975)
MCU_SWD_IO: J2.4 MCU1.34 | length 23
  Top Layer w0.3: v1(95.35,91.75) 96.355,91.75 98.355,89.75 MCU1.34
  Bottom Layer w0.3: J2.4 87.07,93.39 93.71,93.39 v1(95.35,91.75)
NetDS1_2: DS1.2 R6.1 | length 2.2
  Top Layer w0.2: DS1.2 98.729,81.971 R6.1
NRST: C13.1 MCU1.7 R3.2 | length 8.1
  Top Layer w0.2: R3.2 92.896,92.1 92.896,92.004 93.5,91.4 93.821,91.079 93.821,90.657 93.817,90.653 93.817,89.876 v1(93.834,89.859) ; MCU1.7 96.693,87.75 96.844,87.901 v1(96.899,87.901)
  Bottom Layer w0.2: v1(93.834,89.859) 94.941,89.859 v1(96.899,87.901)
OSC_IN: C14.1 MCU1.6 Y1.1 | length 7.5
  Top Layer w0.2: C14.1 91.746,84.617 92.054,84.925 92.925,84.925 93.519,85.519 Y1.1 94.073,86.173 94.5,86.6 94.5,87.043 94.698,87.241 94.698,87.655 94.5,87.854 94.5,88 94.75,88.25 MCU1.6
OSC_OUT: C15.1 MCU1.5 Y1.3 | length 5
  Top Layer w0.2: Y1.3 92.781,87.686 92.781,88.381 92.878,88.478 92.878,88.778 C15.1 93.16,88.74 93.16,88.54 93.4,88.3 94.234,88.3 94.684,88.75 MCU1.5
RED_LED: DS1.1 MCU1.13 | length 3.5
  Top Layer w0.2: DS1.1 95.375,82.171 95.375,82.475 95.7,82.8 97.083,82.8 97.2,82.917 97.2,83.75 MCU1.13
SCL: MCU1.42 R5.1 U2.7 | length 12.3
  Top Layer w0.2: MCU1.42 100.25,93.093 100.362,93.205 100.362,93.312 v1(100.4,93.35) ; U2.7 102.363,100.588 103.762,100.588 v1(103.8,100.55) 103.854,100.55 104.004,100.7 R5.1
  Bottom Layer w0.2: v1(100.4,93.35) 103.8,96.75 v1(103.8,100.55)
SDA: MCU1.43 R4.1 U2.6 | length 11.5
  Top Layer w0.2: MCU1.43 99.775,92.225 99.775,93.45 v1(99.8,93.475) ; v1(100.815,99.365) U2.6 104.635,99.365 R4.1
  Bottom Layer w0.2: v1(99.8,93.475) 100.725,94.4 100.725,99.275 v1(100.815,99.365)
USBD_N: J1.A7 J1.B7 MCU1.32 U3.2 | length 24.8
  Top Layer w0.2: MCU1.32 106.013,88.75 107.563,87.2 111.16,87.2 115.223,91.263 115.223,92.32 114.95,92.593 114.95,93.841 115.1,93.991 U3.2 115.223,94.619 115.223,95.132 115.455,95.364 115.455,99.329 115.011,99.773 114.645,99.773 114.447,99.575 J1.B7 114.239,99.661 113.773,99.661 113.009,100.425 J1.A7
USBD_P: J1.A6 J1.B6 MCU1.33 U3.1 | length 27.8
  Top Layer w0.2: MCU1.33 104.213,89.263 106.163,89.263 v1(106.175,89.275) ; v1(106.213,87.592) 106.251,87.553 106.568,87.553 107.375,86.746 111.348,86.746 115.677,91.075 115.677,92.32 115.95,92.593 115.95,93.841 115.8,93.991 U3.1 115.677,94.619 115.677,94.944 115.909,95.176 115.909,99.517 115.199,100.227 114.645,100.227 114.447,100.425 J1.B6 ; J1.A6@112.853,99.575 J1.A6
  Bottom Layer w0.2: v1(106.175,89.275) 106.175,87.629 v1(106.213,87.592) ; J1.A6 113.009,99.575 113.773,100.339 114.239,100.339 J1.B6
VBUS: C3.2 D2.1 D2.3 D2.4 D2.5 FB1.1 J1.A4 J1.A9 J1.B4 J1.B9 | length 40.3
  Top Layer w0.5: v1(113.05,108.725) 114.25,108.725 114.3,108.775 D2.3 ; D2.4 114.275,106.275 113.55,106.275 112.2,104.925 112.2,102.654 112.729,102.125 J1.A9 J1.B4 114.354,102.154 114.6,102.154 115.605,103.159 115.605,104.698 115.25,105.053 D2.5 ; v1(116.2,107.45) D2.1
  Bottom Layer w0.5: J1.A9 J1.B4 ; v1(113.05,108.725) 113.025,108.725 112.2,107.9 112.2,105.3 111.805,104.905 111.805,103.745 112.2,103.35 112.2,98.404 112.7,97.904 112.946,97.904 J1.A4 J1.B9 114.354,97.904 114.6,97.904 116.2,99.504 116.2,103.787 116.035,103.952 116.035,104.698 116.2,104.863 v1(116.2,107.45)
pads on no net: D2.6 J1.1 J1.2 J1.3 J1.4 J1.A5 J1.A8 J1.B5 J1.B8 MCU1.2 MCU1.3 MCU1.4 MCU1.10 MCU1.11 MCU1.12 MCU1.14 MCU1.15 MCU1.16 MCU1.17 MCU1.18 MCU1.19 MCU1.20 MCU1.21 MCU1.22 MCU1.25 MCU1.26 MCU1.27 MCU1.28 MCU1.29 MCU1.30 MCU1.31 MCU1.38 MCU1.39 MCU1.40 MCU1.41 MCU1.45 MCU1.46 U2.3 U2.5
copper on no net:
  other v3: 90,90 110,90 90,110 110,110

## Polygon pours and split planes (outlines as drawn)
GND on Top Layer "GND_L01_P003" (solid, pour order 3): 100,79.953 cw(c100,100) 79.953,100 cw(c100,100) 100,120.047 cw(c100,100) 120.047,100 cw(c100,100)
+3V3 on Top Layer "NONET_L-01_P-001" (solid, pour order 2): 92.625,107.625 92.625,109.25 93.325,109.25 95.375,111.3 95.375,111.375 95.475,111.375 96.1,112 96.225,111.875 101.825,111.875 101.825,109.35 100.1,107.625 96.15,107.625
VBUS on Top Layer "NONET_L-01_P-001" (solid, pour order 0): 109.425,101.7 109.425,101.675 109.425,96.825 111.3,96.825 111.925,97.45 114.8,97.45 114.9,97.55 114.9,98.175 114.65,98.425 112.475,98.425 111.75,99.15 111.75,101.75 113.6,101.75 114.875,101.75 114.875,102.425 114.75,102.55 114.7,102.5 111.55,102.5 111.275,102.225 110.725,101.675 109.488,101.638
GND on Bottom Layer "GND_L02_P004" (solid, pour order 4): 100,79.953 cw(c100,100) 79.953,100 cw(c100,100) 100,120.047 cw(c100,100) 120.047,100 cw(c100,100)

## Keep-outs
Keep-Out Layer:
  circle w0.254: c100,100 r20.047

## Text inside footprints (layer, text, board x,y; h text height)
J2: Top Overlay "IO" at 82.1,96.83 h0.5 r270; Top Overlay "CLK" at 82.1,99.655 h0.5 r270; Top Overlay "3.3V" at 82.1,102.43 h0.5 r270; Top Overlay "GND" at 82.1,104.755 h0.5 r270